# Altium PCB Function-Generator.PcbDoc (part 1 of 2)
Units mm, origin at the board's own origin, x right, y up, seen from the top; angles counter-clockwise.
Board outline 70 x 70 mm, 2 copper layers (Top Layer, Bottom Layer), stack 1.569 mm thick; 87 components, 40 nets, 246 pads, 57 vias.
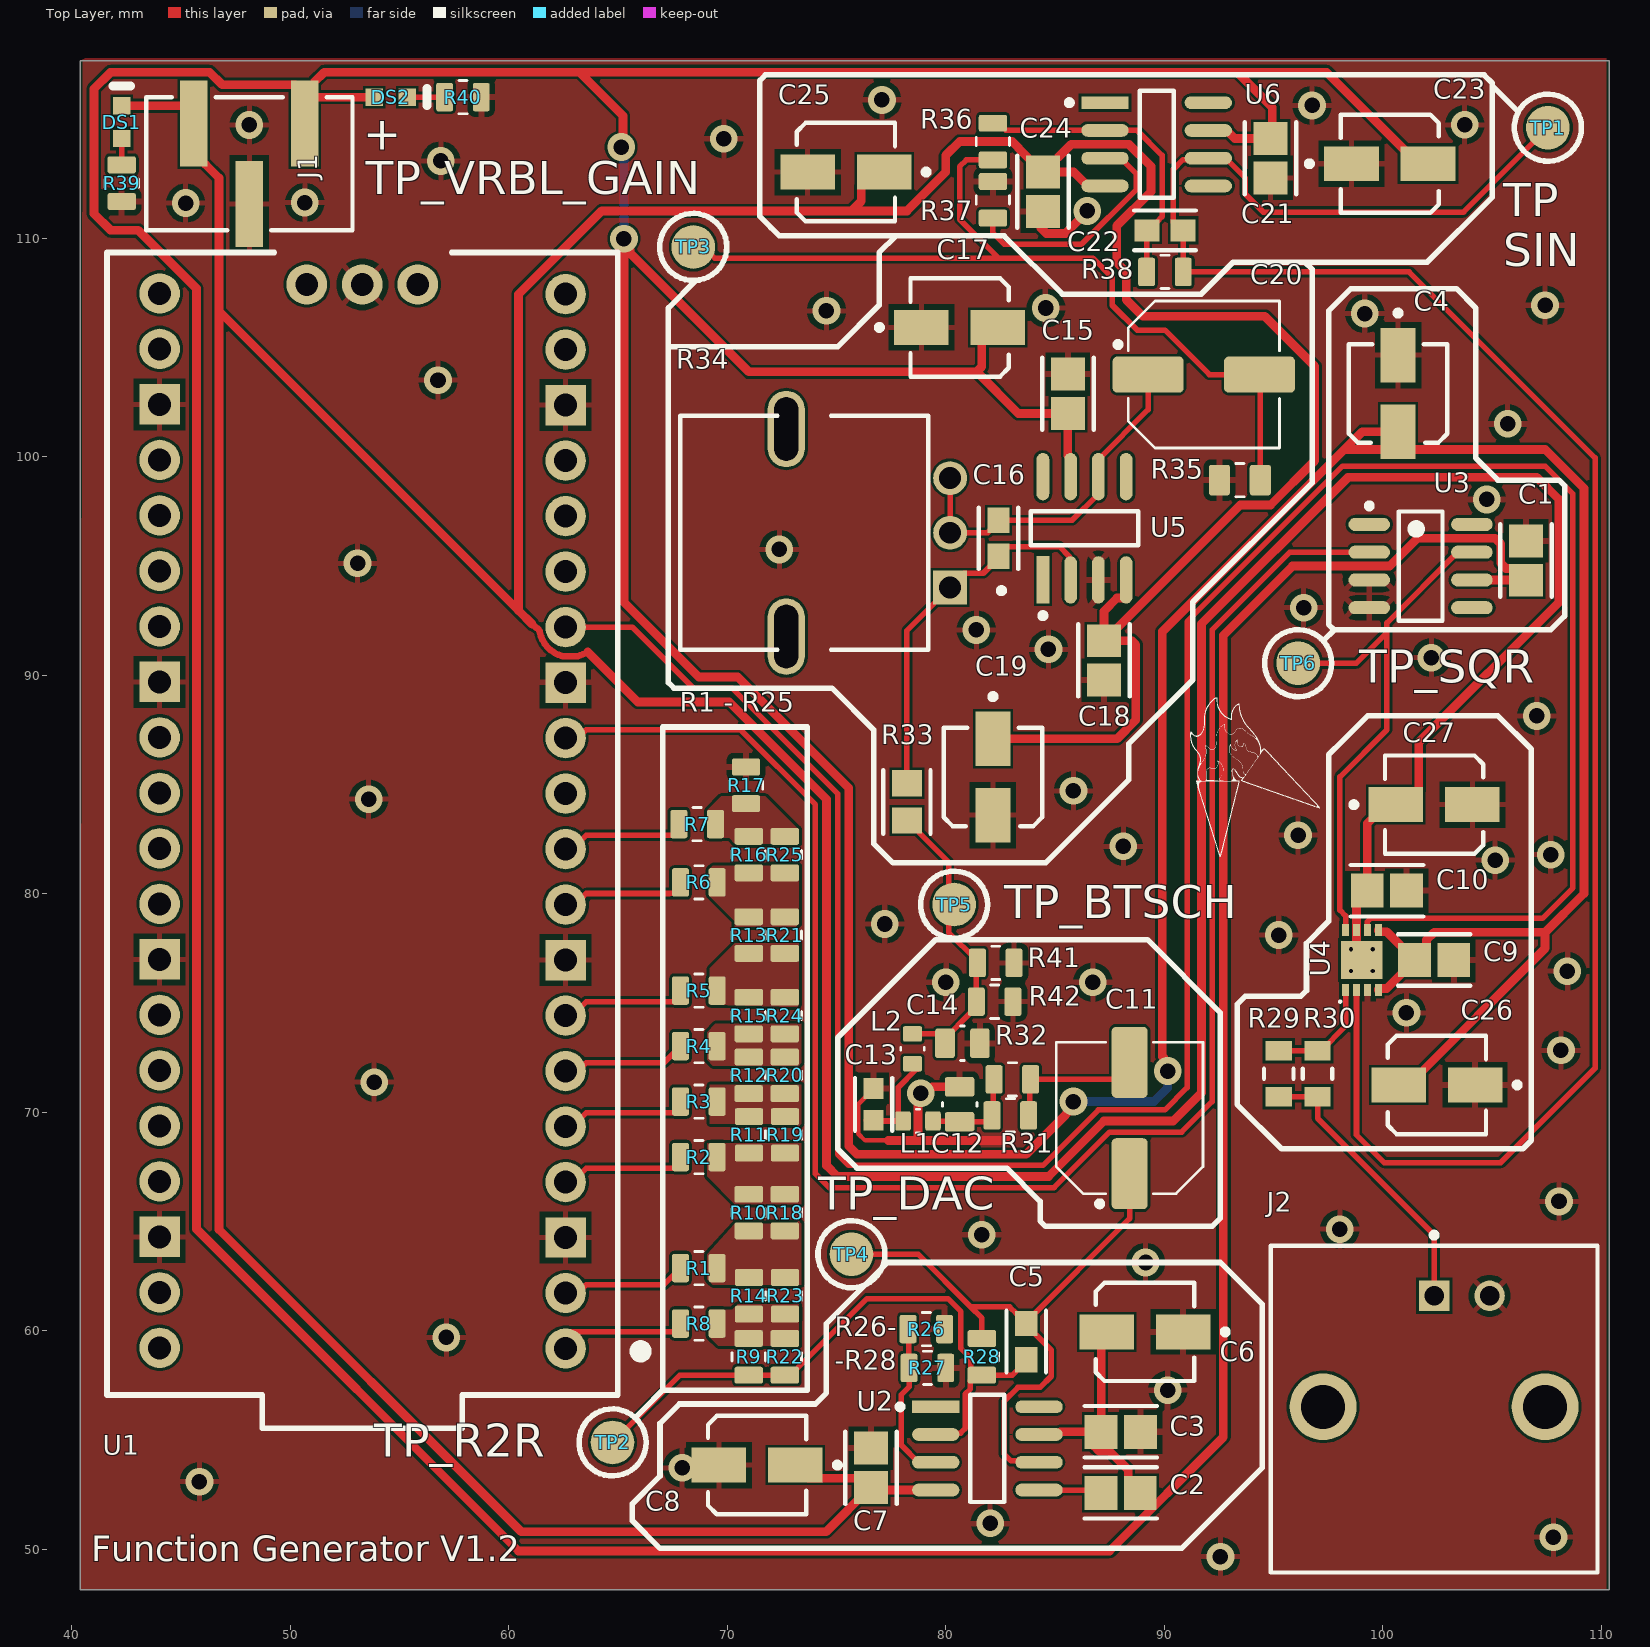
[diagram p0: Top Layer view]
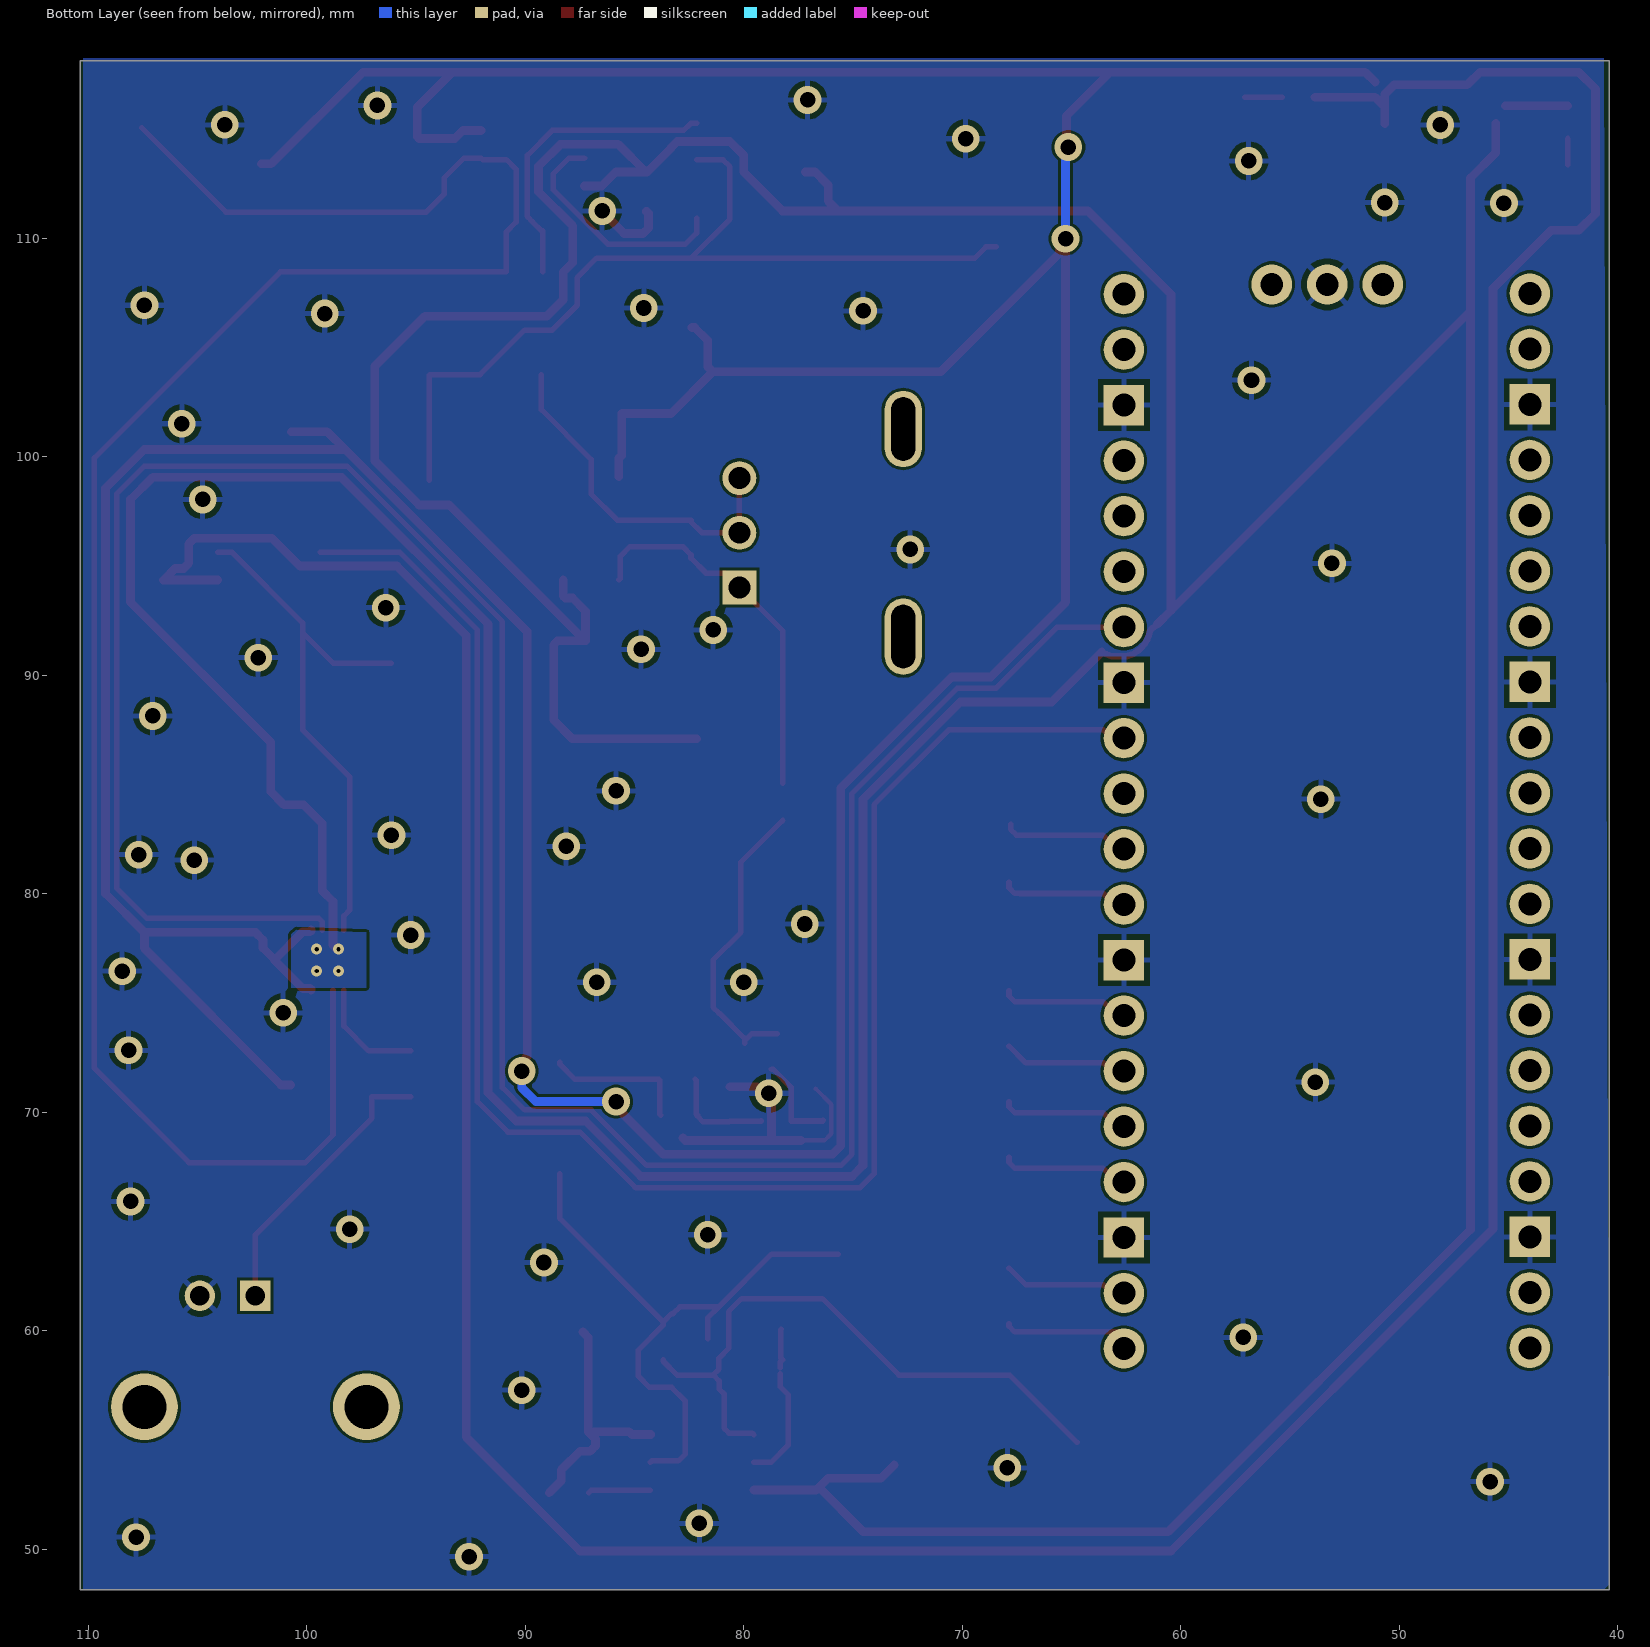
[diagram p1: Bottom Layer view, seen from below]

## Layer stack, top to bottom
Top Solder: solder mask 0.0254, SM-001, Dk 4
Top Layer: signal copper 0.035
Dielectric 1: core 1.4986, Core-043, Dk 4.3
Bottom Layer: signal copper 0.035
Bottom Solder: solder mask 0.0254, SM-001, Dk 4

## Board outline
40.386,48.133 40.386,118.133 110.386,118.133 110.386,48.133

## Design rules (kind name [scope] priority, off if disabled: settings)
Clearance [All] p1: gap=0.127 ignorepadtopadclearanceinfootprint=FALSE except(0.254: THPad-Via Via-Via)
HoleSize [All] p1: absolutevalues=TRUE maxlimit=6 minlimit=0.3 maxpercent=80.000 minpercent=20.000
MinimumSolderMaskSliver [All] p1: minsoldermaskwidth=0.11
PolygonConnect PolygonConnect_36 [All vs InNet('GND')] p1: thpad.connectstyle=Relief thpad.reliefconductorwidth=0.254 thpad.reliefentries=4 thpad.polygonreliefangle="90 Angle" thpad.airgapwidth=0.254 thpad.conductorbypadedge=TRUE thpad.mindistance=0.381 thpad.enablemindistance=FALSE smdpad.connectstyle=Relief smdpad.reliefconductorwidth=0.254 smdpad.reliefentries=4 smdpad.polygonreliefangle="90 Angle" smdpad.airgapwidth=0.254 smdpad.conductorbypadedge=TRUE smdpad.mindistance=0.381 smdpad.enablemindistance=FALSE via.connectstyle=Relief via.reliefconductorwidth=0.254 via.reliefentries=4 via.polygonreliefangle="90 Angle" via.airgapwidth=0.254
PolygonConnect PolygonConnect_35 [All vs IsNamedPolygon('NONET_L-01_P-001')] p2: connectstyle=Direct reliefconductorwidth=0.254 reliefentries=4 polygonreliefangle="90 Angle" airgapwidth=0.254
PolygonConnect PolygonConnect_34 [All vs IsNamedPolygon('NONET_L-01_P-001')] p3: connectstyle=Direct reliefconductorwidth=0.254 reliefentries=4 polygonreliefangle="90 Angle" airgapwidth=0.254
PolygonConnect PolygonConnect_33 [All vs IsNamedPolygon('NONET_L-01_P-001')] p4: thpad.connectstyle=Relief thpad.reliefconductorwidth=0.254 thpad.reliefentries=4 thpad.polygonreliefangle="90 Angle" thpad.airgapwidth=0.254 thpad.conductorbypadedge=TRUE thpad.mindistance=0.381 thpad.enablemindistance=FALSE smdpad.connectstyle=Relief smdpad.reliefconductorwidth=0.254 smdpad.reliefentries=4 smdpad.polygonreliefangle="90 Angle" smdpad.airgapwidth=0.254 smdpad.conductorbypadedge=TRUE smdpad.mindistance=0.381 smdpad.enablemindistance=FALSE via.connectstyle=Relief via.reliefconductorwidth=0.254 via.reliefentries=4 via.polygonreliefangle="90 Angle" via.airgapwidth=0.254
PolygonConnect PolygonConnect_32 [All vs IsNamedPolygon('NONET_L-01_P-001')] p5: thpad.connectstyle=Direct thpad.reliefconductorwidth=0.254 thpad.reliefentries=4 thpad.polygonreliefangle="90 Angle" thpad.airgapwidth=0.254 smdpad.connectstyle=Direct smdpad.reliefconductorwidth=0.254 smdpad.reliefentries=4 smdpad.polygonreliefangle="90 Angle" smdpad.airgapwidth=0.254 via.connectstyle=Relief via.reliefconductorwidth=0.254 via.reliefentries=4 via.polygonreliefangle="90 Angle" via.airgapwidth=0.254
PolygonConnect PolygonConnect_31 [All vs IsNamedPolygon('NONET_L-01_P-001')] p6: thpad.connectstyle=Direct thpad.reliefconductorwidth=0.254 thpad.reliefentries=4 thpad.polygonreliefangle="90 Angle" thpad.airgapwidth=0.254 smdpad.connectstyle=Direct smdpad.reliefconductorwidth=0.254 smdpad.reliefentries=4 smdpad.polygonreliefangle="90 Angle" smdpad.airgapwidth=0.254 via.connectstyle=Relief via.reliefconductorwidth=0.254 via.reliefentries=4 via.polygonreliefangle="90 Angle" via.airgapwidth=0.254
PolygonConnect PolygonConnect_30 [All vs IsNamedPolygon('NONET_L-01_P-001')] p7: thpad.connectstyle=Direct thpad.reliefconductorwidth=0.254 thpad.reliefentries=4 thpad.polygonreliefangle="90 Angle" thpad.airgapwidth=0.254 smdpad.connectstyle=Direct smdpad.reliefconductorwidth=0.254 smdpad.reliefentries=4 smdpad.polygonreliefangle="90 Angle" smdpad.airgapwidth=0.254 via.connectstyle=Relief via.reliefconductorwidth=0.254 via.reliefentries=4 via.polygonreliefangle="90 Angle" via.airgapwidth=0.254
PolygonConnect PolygonConnect_29 [All vs IsNamedPolygon('NONET_L-01_P-001')] p8: thpad.connectstyle=Direct thpad.reliefconductorwidth=0.254 thpad.reliefentries=4 thpad.polygonreliefangle="90 Angle" thpad.airgapwidth=0.254 smdpad.connectstyle=Direct smdpad.reliefconductorwidth=0.254 smdpad.reliefentries=4 smdpad.polygonreliefangle="90 Angle" smdpad.airgapwidth=0.254 via.connectstyle=Relief via.reliefconductorwidth=0.254 via.reliefentries=4 via.polygonreliefangle="90 Angle" via.airgapwidth=0.254
PolygonConnect PolygonConnect_28 [All vs IsNamedPolygon('NONET_L-01_P-001')] p9: thpad.connectstyle=Direct thpad.reliefconductorwidth=0.254 thpad.reliefentries=4 thpad.polygonreliefangle="90 Angle" thpad.airgapwidth=0.254 smdpad.connectstyle=Direct smdpad.reliefconductorwidth=0.254 smdpad.reliefentries=4 smdpad.polygonreliefangle="90 Angle" smdpad.airgapwidth=0.254 via.connectstyle=Relief via.reliefconductorwidth=0.254 via.reliefentries=4 via.polygonreliefangle="90 Angle" via.airgapwidth=0.254
PolygonConnect PolygonConnect_27 [All vs IsNamedPolygon('NONET_L-01_P-001')] p10: thpad.connectstyle=Direct thpad.reliefconductorwidth=0.254 thpad.reliefentries=4 thpad.polygonreliefangle="90 Angle" thpad.airgapwidth=0.254 smdpad.connectstyle=Direct smdpad.reliefconductorwidth=0.254 smdpad.reliefentries=4 smdpad.polygonreliefangle="90 Angle" smdpad.airgapwidth=0.254 via.connectstyle=Relief via.reliefconductorwidth=0.254 via.reliefentries=4 via.polygonreliefangle="90 Angle" via.airgapwidth=0.254
PolygonConnect PolygonConnect_26 [All vs IsNamedPolygon('NONET_L-01_P-001')] p11: thpad.connectstyle=Direct thpad.reliefconductorwidth=0.254 thpad.reliefentries=4 thpad.polygonreliefangle="90 Angle" thpad.airgapwidth=0.254 smdpad.connectstyle=Direct smdpad.reliefconductorwidth=0.254 smdpad.reliefentries=4 smdpad.polygonreliefangle="90 Angle" smdpad.airgapwidth=0.254 via.connectstyle=Relief via.reliefconductorwidth=0.254 via.reliefentries=4 via.polygonreliefangle="90 Angle" via.airgapwidth=0.254
PolygonConnect PolygonConnect_25 [All vs IsNamedPolygon('NONET_L-01_P-001')] p12: thpad.connectstyle=Direct thpad.reliefconductorwidth=0.254 thpad.reliefentries=4 thpad.polygonreliefangle="90 Angle" thpad.airgapwidth=0.254 smdpad.connectstyle=Direct smdpad.reliefconductorwidth=0.254 smdpad.reliefentries=4 smdpad.polygonreliefangle="90 Angle" smdpad.airgapwidth=0.254 via.connectstyle=Relief via.reliefconductorwidth=0.254 via.reliefentries=4 via.polygonreliefangle="90 Angle" via.airgapwidth=0.254
PolygonConnect PolygonConnect_24 [All vs IsNamedPolygon('NONET_L-01_P-001')] p13: connectstyle=Direct reliefconductorwidth=0.254 reliefentries=4 polygonreliefangle="90 Angle" airgapwidth=0.254
PolygonConnect PolygonConnect_23 [All vs IsNamedPolygon('NONET_L-01_P-001')] p14: thpad.connectstyle=Relief thpad.reliefconductorwidth=0.254 thpad.reliefentries=4 thpad.polygonreliefangle="90 Angle" thpad.airgapwidth=0.254 thpad.conductorbypadedge=TRUE thpad.mindistance=0.381 thpad.enablemindistance=FALSE smdpad.connectstyle=Relief smdpad.reliefconductorwidth=0.254 smdpad.reliefentries=4 smdpad.polygonreliefangle="90 Angle" smdpad.airgapwidth=0.254 smdpad.conductorbypadedge=TRUE smdpad.mindistance=0.381 smdpad.enablemindistance=FALSE via.connectstyle=Relief via.reliefconductorwidth=0.254 via.reliefentries=4 via.polygonreliefangle="90 Angle" via.airgapwidth=0.254
PolygonConnect PolygonConnect_22 [All vs IsNamedPolygon('NONET_L-01_P-001')] p15: thpad.connectstyle=Relief thpad.reliefconductorwidth=0.254 thpad.reliefentries=4 thpad.polygonreliefangle="90 Angle" thpad.airgapwidth=0.254 thpad.conductorbypadedge=TRUE thpad.mindistance=0.381 thpad.enablemindistance=FALSE smdpad.connectstyle=Relief smdpad.reliefconductorwidth=0.254 smdpad.reliefentries=4 smdpad.polygonreliefangle="90 Angle" smdpad.airgapwidth=0.254 smdpad.conductorbypadedge=TRUE smdpad.mindistance=0.381 smdpad.enablemindistance=FALSE via.connectstyle=Relief via.reliefconductorwidth=0.254 via.reliefentries=4 via.polygonreliefangle="90 Angle" via.airgapwidth=0.254
PolygonConnect PolygonConnect_21 [All vs IsNamedPolygon('NONET_L-01_P-001')] p16: thpad.connectstyle=Direct thpad.reliefconductorwidth=0.254 thpad.reliefentries=4 thpad.polygonreliefangle="90 Angle" thpad.airgapwidth=0.254 smdpad.connectstyle=Direct smdpad.reliefconductorwidth=0.254 smdpad.reliefentries=4 smdpad.polygonreliefangle="90 Angle" smdpad.airgapwidth=0.254 via.connectstyle=Relief via.reliefconductorwidth=0.254 via.reliefentries=4 via.polygonreliefangle="90 Angle" via.airgapwidth=0.254
PolygonConnect PolygonConnect_20 [All vs IsNamedPolygon('NONET_L-01_P-001')] p17: connectstyle=Direct reliefconductorwidth=0.254 reliefentries=4 polygonreliefangle="90 Angle" airgapwidth=0.254
PolygonConnect PolygonConnect_19 [All vs IsNamedPolygon('NETR8_2_L01_P006')] p18: connectstyle=Direct reliefconductorwidth=0.254 reliefentries=4 polygonreliefangle="90 Angle" airgapwidth=0.254
PolygonConnect PolygonConnect_18 [All vs IsNamedPolygon('NETR7_2_L01_P005')] p19: connectstyle=Direct reliefconductorwidth=0.254 reliefentries=4 polygonreliefangle="90 Angle" airgapwidth=0.254
PolygonConnect PolygonConnect_17 [All vs IsNamedPolygon('NONET_L01_P004')] p20: connectstyle=Direct reliefconductorwidth=0.254 reliefentries=4 polygonreliefangle="90 Angle" airgapwidth=0.254
PolygonConnect PolygonConnect_16 [All vs IsNamedPolygon('NETR5_2_L01_P003')] p21: connectstyle=Direct reliefconductorwidth=0.254 reliefentries=4 polygonreliefangle="90 Angle" airgapwidth=0.254
PolygonConnect PolygonConnect_15 [All vs IsNamedPolygon('NONET_L01_P002')] p22: connectstyle=Direct reliefconductorwidth=0.254 reliefentries=4 polygonreliefangle="90 Angle" airgapwidth=0.254
PolygonConnect PolygonConnect_14 [All vs IsNamedPolygon('NONET_L01_P001')] p23: connectstyle=Direct reliefconductorwidth=0.254 reliefentries=4 polygonreliefangle="90 Angle" airgapwidth=0.254
PolygonConnect PolygonConnect_13 [All vs IsNamedPolygon('NONET_L01_P000')] p24: connectstyle=Direct reliefconductorwidth=0.254 reliefentries=4 polygonreliefangle="90 Angle" airgapwidth=0.254
PolygonConnect PolygonConnect_12 [All vs IsNamedPolygon('NONET_L02_P012')] p25: connectstyle=Direct reliefconductorwidth=0.254 reliefentries=4 polygonreliefangle="90 Angle" airgapwidth=0.254
PolygonConnect PolygonConnect_11 [All vs IsNamedPolygon('VEE_L02_P011')] p26: connectstyle=Direct reliefconductorwidth=0.254 reliefentries=4 polygonreliefangle="90 Angle" airgapwidth=0.254
PolygonConnect PolygonConnect_10 [All vs IsNamedPolygon('NONET_L01_P008')] p27: connectstyle=Relief reliefconductorwidth=0.254 reliefentries=4 polygonreliefangle="90 Angle" airgapwidth=0.254
PolygonConnect PolygonConnect_9 [InNetClass('R-2R')] p28: connectstyle=Direct reliefconductorwidth=0.254 reliefentries=4 polygonreliefangle="90 Angle" airgapwidth=0.254
PolygonConnect PolygonConnect_8 [All vs IsNamedPolygon('NONET_L01_P015')] p29: connectstyle=Direct reliefconductorwidth=0.254 reliefentries=4 polygonreliefangle="90 Angle" airgapwidth=0.254
PolygonConnect PolygonConnect_7 [All vs IsNamedPolygon('NONET_L01_P014')] p30: connectstyle=Direct reliefconductorwidth=0.254 reliefentries=4 polygonreliefangle="90 Angle" airgapwidth=0.254
PolygonConnect PolygonConnect_6 [All vs IsNamedPolygon('NONET_L01_P011')] p31: connectstyle=Direct reliefconductorwidth=0.254 reliefentries=4 polygonreliefangle="90 Angle" airgapwidth=0.254
PolygonConnect PolygonConnect_5 [All vs IsNamedPolygon('NONET_L01_P010')] p32: connectstyle=Direct reliefconductorwidth=0.254 reliefentries=4 polygonreliefangle="90 Angle" airgapwidth=0.254
PolygonConnect PolygonConnect_4 [All vs IsNamedPolygon('NONET_L01_P008')] p33: connectstyle=Direct reliefconductorwidth=0.254 reliefentries=4 polygonreliefangle="90 Angle" airgapwidth=0.254
PolygonConnect PolygonConnect_3 [All vs IsNamedPolygon('NONET_L01_P007')] p34: thpad.connectstyle=Direct thpad.reliefconductorwidth=0.254 thpad.reliefentries=4 thpad.polygonreliefangle="90 Angle" thpad.airgapwidth=0.254 smdpad.connectstyle=Direct smdpad.reliefconductorwidth=0.254 smdpad.reliefentries=4 smdpad.polygonreliefangle="90 Angle" smdpad.airgapwidth=0.254 via.connectstyle=Relief via.reliefconductorwidth=0.254 via.reliefentries=4 via.polygonreliefangle="90 Angle" via.airgapwidth=0.254
PolygonConnect net22 [All vs IsNamedPolygon('NETR8_2_L01_P006')] p35: connectstyle=Direct reliefconductorwidth=0.254 reliefentries=4 polygonreliefangle="90 Angle" airgapwidth=0.254
PolygonConnect PolygonConnect_2 [All vs IsNamedPolygon('NETR8_2_L01_P006')] p36: connectstyle=Direct reliefconductorwidth=0.254 reliefentries=4 polygonreliefangle="90 Angle" airgapwidth=0.254
PolygonConnect PolygonConnect_1 [All vs IsNamedPolygon('NETR8_2_L01_P006')] p37: thpad.connectstyle=Direct thpad.reliefconductorwidth=0.254 thpad.reliefentries=4 thpad.polygonreliefangle="90 Angle" thpad.airgapwidth=0.254 smdpad.connectstyle=Direct smdpad.reliefconductorwidth=0.254 smdpad.reliefentries=4 smdpad.polygonreliefangle="90 Angle" smdpad.airgapwidth=0.254 via.connectstyle=Relief via.reliefconductorwidth=0.254 via.reliefentries=4 via.polygonreliefangle="90 Angle" via.airgapwidth=0.254
PolygonConnect [All] p38: connectstyle=Relief reliefconductorwidth=0.254 reliefentries=4 polygonreliefangle="90 Angle" airgapwidth=0.254
RoutingVias [All] p1: holewidth=0.711 width=1.27 viastyle="Through Hole" minholewidth=0.6 minwidth=1.27 maxholewidth=0.711 maxwidth=1.27
SilkToSilkClearance [All] p1: silktosilkclearance=0.18
SilkToSolderMaskClearance [IsPad] p1: minsilkscreentomaskgap=0.18 clearancetoexposedcopper=TRUE
SolderMaskExpansion [All] p1: expansion=0 istentingtop=FALSE
SupplyNets "Schematic Supply Nets_2" [InNet('GND')] p1: voltage=0.000
SupplyNets "Schematic Supply Nets_1" [InNet('VEE')] p2: voltage=0.000
SupplyNets "Schematic Supply Nets" [InNet('VCC')] p3: voltage=0.000
Width Width_1 [(InNet('GND') OR InNet('VEE') OR InNet('VCC'))] p1: maxlimit=1 minlimit=0.127 preferedwidth=0.4 bottomlayer_minwidth=0.3 minimp=50.000000 maximp=50.000000 favimp=50.000000
Width [All] p2: maxlimit=0.254 minlimit=0.127 preferedwidth=0.254 bottomlayer_minwidth=0.254 minimp=50.000000 maximp=50.000000 favimp=50.000000
26 further rules are at their usual default settings.

## Classes and differential pairs
polygon class PolygonClass_1: NETR4_2_L01_P002

## Components (designator, comment, footprint, x,y, rotation, side; value= is the part's Value field where it differs from the comment)
C1 "CL21B104KCFNNNE" FP-CC0805-0_85-IPC_A 106.569,95.25 r90 top value=100nF
C2 "CL21B104KCFNNNE" FP-CC0805-0_85-IPC_A 88.011,52.578 r0 top value=100nF
C3 "CL21B104KCFNNNE" FP-CC0805-0_85-IPC_A 88.023,55.372 r0 top value=100nF
C4 "EEEFTH100UAR" FP-FTB-MFG 100.711,102.898 r270 top value=10µF
C5 "GCH1885C2A5R0CE01J" FP-GCH188-0_1-e0_2_0_5-IPC_A 83.693,59.501 r90 top value=5pF
C6 "EEEFTH100UAR" FP-FTB-MFG 89.126,59.944 r180 top value=10µF
C7 "CL21B104KCFNNNE" FP-CC0805-0_85-IPC_A 76.581,53.721 r90 top value=100nF
C8 "EEEFTH100UAR" FP-FTB-MFG 71.374,53.848 r180 top value=10µF
C9 "CL21B104KCFNNNE" FP-CC0805-0_85-IPC_A 102.362,76.962 r0 top value=100nF
C10 "CL21B104KCFNNNE" FP-CC0805-0_85-IPC_A 100.203,80.137 r0 top value=100nF
C11 "25SEV100M6.3X8" CAPAE660650X800N 88.426,69.733 r90 top value=100µF
C12 "08055A102FAT2A" Chip2PinSM127P600-8N#1 80.645,70.358 r270 top value=1nF
C13 "GCM1885C1H332FA16D" FP-CL10-IPC_B 76.708,70.358 r90 top value=3.3nF
C14 "08055A102FAT2A" Chip2PinSM127P600-8N#1 80.772,73.152 r180 top value=1nF
C15 "CL21B104KCFNNNE" FP-CC0805-0_85-IPC_A 85.598,102.882 r90 top value=100nF
C16 "GCH1885C2A5R0CE01J" FP-GCH188-0_1-e0_2_0_5-IPC_A 82.423,96.266 r90 top value=5pF
C17 "EEEFTH100UAR" FP-FTB-MFG 80.645,105.918 r0 top value=10µF
C18 "CL21B104KCFNNNE" FP-CC0805-0_85-IPC_A 87.249,90.678 r270 top value=100nF
C19 "EEEFTH100UAR" FP-FTB-MFG 82.169,85.344 r270 top value=10µF
C20 "25SEV100M6.3X8" CAPAE660650X800N 91.821,103.759 r0 top value=100µF
C21 "CL21B104KCFNNNE" FP-CC0805-0_85-IPC_A 94.869,113.665 r270 top value=100nF
C22 "GCH1885C2A5R0CE01J" FP-GCH188-0_1-e0_2_0_5-IPC_A 90.043,110.363 r0 top value=5pF
C23 "EEEFTH100UAR" FP-FTB-MFG 100.33,113.411 r0 top value=10µF
C24 "CL21B104KCFNNNE" FP-CC0805-0_85-IPC_A 84.455,112.129 r270 top value=100nF
C25 "EEEFTH100UAR" FP-FTB-MFG 75.438,113.03 r180 top value=10µF
C26 "EEEFTH100UAR" FP-FTB-MFG 102.489,71.247 r180 top value=10µF
C27 "EEEFTH100UAR" FP-FTB-MFG 102.362,84.074 r0 top value=10µF
DS1 "19-217/BHC-ZL1M2RY/3T" EVRL-0603-2_V 42.291,115.316 r90 top
DS2 "19-217/R6C-AL1M2VY/3T" EVRL-0603-2_V 54.61,116.459 r0 top
J1 "IPL1-103-02-L-S-K" FP-IPL1-103-02-L-S-K-0 48.133,113.411 r90 top
J2 "5227161-6" FP-5227161-6-MFG 102.362,45.715 r180 top
L1 "SDFL1608S100KTF" Chip2PinSM127P600-8N#2 78.74,69.596 r180 top value=10µH
L2 "SDFL1608S100KTF" Chip2PinSM127P600-8N#2 78.486,72.898 r90 top value=10µH
R1 "0805W8F2201T5E" Chip2PinSM127P600-8N#3 68.707,62.865 r0 top
R2 "0805W8F2201T5E" Chip2PinSM127P600-8N#3 68.707,67.945 r0 top
R3 "0805W8F2201T5E" Chip2PinSM127P600-8N#3 68.707,70.485 r0 top
R4 "0805W8F2201T5E" Chip2PinSM127P600-8N#3 68.707,73.025 r0 top
R5 "0805W8F2201T5E" Chip2PinSM127P600-8N#3 68.707,75.565 r0 top
R6 "0805W8F2201T5E" Chip2PinSM127P600-8N#3 68.707,80.518 r0 top
R7 "0805W8F2201T5E" Chip2PinSM127P600-8N#3 68.631,83.185 r0 top
R8 "0805W8F2201T5E" Chip2PinSM127P600-8N#3 68.707,60.325 r0 top
R9 "0805W8F2201T5E" Chip2PinSM127P600-8N#3 70.993,58.801 r90 top
R10 "0805W8F2201T5E" Chip2PinSM127P600-8N#3 70.993,65.405 r90 top
R11 "0805W8F2201T5E" Chip2PinSM127P600-8N#3 71.001,68.961 r90 top
R12 "0805W8F2201T5E" Chip2PinSM127P600-8N#3 70.992,71.687 r90 top
R13 "0805W8F2201T5E" Chip2PinSM127P600-8N#3 70.993,78.105 r90 top
R14 "0805W8F2201T5E" Chip2PinSM127P600-8N#3 71.001,61.595 r90 top
R15 "0805W8F2201T5E" Chip2PinSM127P600-8N#3 70.993,74.422 r90 top
R16 "0805W8F2201T5E" Chip2PinSM127P600-8N#3 70.993,81.788 r90 top
R17 "0805W8F2201T5E" Chip2PinSM127P600-8N#3 70.866,84.963 r90 top
R18 "0805W8F2201T5E" Chip2PinSM127P600-8N#3 72.644,65.405 r90 top
R19 "0805W8F2201T5E" Chip2PinSM127P600-8N#3 72.652,68.961 r90 top
R20 "0805W8F2201T5E" Chip2PinSM127P600-8N#3 72.643,71.687 r90 top
R21 "0805W8F2201T5E" Chip2PinSM127P600-8N#3 72.644,78.105 r90 top
R22 "0805W8F2201T5E" Chip2PinSM127P600-8N#3 72.644,58.801 r90 top
R23 "0805W8F2201T5E" Chip2PinSM127P600-8N#3 72.652,61.595 r90 top
R24 "0805W8F2201T5E" Chip2PinSM127P600-8N#3 72.644,74.422 r90 top
R25 "0805W8F2201T5E" Chip2PinSM127P600-8N#3 72.644,81.788 r90 top
R26 "0805W8F2201T5E" Chip2PinSM127P600-8N#3 79.121,60.071 r0 top
R27 "0805W8F2201T5E" Chip2PinSM127P600-8N#3 79.172,58.293 r0 top
R28 "0805W8F2201T5E" Chip2PinSM127P600-8N#3 81.661,58.801 r90 top
R29 "SR0805FR-07100RL" FP-SR0805-MFG 95.25,71.755 r270 top value=100
R30 "SR0805FR-07100RL" FP-SR0805-MFG 97.028,71.755 r270 top value=100
R31 "0805W8F1200T5E" Chip2PinSM127P600-8N#3 82.965,69.85 r180 top value=120
R32 "0805W8F1200T5E" Chip2PinSM127P600-8N#3 83.058,71.501 r180 top value=120
R33 "ERA6ARB102V" FP-ERA6A-IPC_B 78.232,84.201 r90 top value=1k
R34 "RK09L1140A2U" FP-RK09L1140A2U-MFG 73.533,96.52 r90 top value=10k
R35 "0805W8F1004T5E" Chip2PinSM127P600-8N#4 93.472,98.933 r180 top value=1M
R36 "0805W8F2201T5E" Chip2PinSM127P600-8N#3 82.169,114.427 r90 top
R37 "0805W8F2201T5E" Chip2PinSM127P600-8N#3 82.169,111.76 r270 top
R38 "0805W8F2201T5E" Chip2PinSM127P600-8N#3 90.043,108.458 r0 top
R39 "0805W8F2201T5E" Chip2PinSM127P600-8N#3 42.291,112.522 r90 top
R40 "0805W8F2201T5E" Chip2PinSM127P600-8N#3 57.912,116.459 r180 top
R41 "0805W8F1200T5E" Chip2PinSM127P600-8N#3 82.296,76.835 r0 top value=120
R42 "0805W8F1200T5E" Chip2PinSM127P600-8N#3 82.244,75.057 r0 top value=120
TP1 "Test Point pad" TestPointPad-2mm 107.569,115.062 r180 top
TP2 "Test Point pad" TestPointPad-2mm 64.756,54.883 r0 top
TP3 "Test Point pad" TestPointPad-2mm 68.453,109.601 r180 top
TP4 "Test Point pad" TestPointPad-2mm 75.692,63.5 r0 top
TP5 "Test Point pad" TestPointPad-2mm 80.391,79.502 r0 top
TP6 "Test Point pad" TestPointPad-2mm 96.139,90.551 r0 top
U1 "RPI-PICO-MOD" RPI-PICO-MOD 53.302,83.47 r180 top
U2 "LM318DR" FP-D0008A-IPC_B 81.915,54.61 r0 top
U3 "TC4427COA" SOIC-OA8_L 101.743,94.996 r0 top value=12Ω
U4 "ADG1419BCPZ-REEL7" ADI-CP-8-4_V 99.06,76.962 r90 top value=2.4Ω
U5 "LM318DR" FP-D0008A-IPC_B 86.36,96.725 r90 top
U6 "LM318DR" FP-D0008A-IPC_B 89.662,114.3 r0 top

## Footprints (in the part's own frame and the unit in brackets; to place one, negate y for a bottom-side part, rotate by r counter-clockwise, add the part's x,y. Pads: shape width x height; smd on the part's side, far side on the other; paste and mask are expansions set on the pad)
ADI-CP-8-4_V [mm] "SON, 8-Leads, Body 3x2mm, Pitch 0.5mm, Thermal Pad 1.75x1.9mm"
  rect 0.55x0.32 smd: 1(-1.375,0.75) 2(-1.375,0.25) 3(-1.375,-0.25) 4(-1.375,-0.75) 5(1.375,-0.75) 6(1.375,-0.25) 7(1.375,0.25) 8(1.375,0.75)
  rect 1.75x1.9 smd: 9(0,0)
  silkscreen extent -1.95,0.95 -1.85,1.05, body extent -1.5,-1 1.5,1, height 0.8
CAPAE660650X800N [mm] "Aluminum Electrolytic Capacitor, Body 6.60x6.50x8.00mm, IPC Medium Density"
  rrect25% 3.25x1.65 smd: 1(-2.55,0) 2(2.55,0)
  silkscreen extent -4.05,-3.36 3.46,3.36, body extent -3.3,-3.25 3.3,3.25, height 8
Chip2PinSM127P600-8N#1 [mm]
  rrect25% 0.9x1.35 smd: 1(-0.8,0) 2(0.8,0)
  silkscreen extent -0.09,-0.79 0.09,0.79, body extent -1,-0.63 1,0.63, height 1.45
Chip2PinSM127P600-8N#2 [mm]
  rrect25% 0.71x0.88 smd: 1(-0.685,0) 2(0.685,0)
  silkscreen extent -0.07,-0.54 0.07,0.54, body extent -0.8,-0.4 0.8,0.4, height 0.95
Chip2PinSM127P600-8N#3 [mm]
  rrect25% 0.775x1.3 smd: 1(-0.837,0) 2(0.838,0)
  silkscreen extent -0.19,-0.76 0.19,0.76, body extent -1,-0.64 1,0.64, height 0.65
Chip2PinSM127P600-8N#4 [mm] "1Mohm basic resistor"
  rrect25% 0.975x1.4 smd: 1(-0.937,0) 2(0.938,0)
  silkscreen extent -0.19,-0.76 0.19,0.76, body extent -1,-0.61 1,0.61, height 0.65
EVRL-0603-2_V [mm] "SMD, 2-Leads, Body 1.6x0.8mm"
  rect 0.8x0.8 smd: 1(-0.75,0) 2(0.75,0)
  silkscreen extent 1.65,-0.4 1.65,0.4, body extent -0.8,-0.4 0.8,0.4, height 0.5
FP-5227161-6-MFG [mm]
  rect 1.39x1.39 hole 0.89 paste-2539.97 mask+0: 1(0,-15.88)
  round 1.39 hole 0.89 paste-2539.97 mask+0: 2(-2.54,-15.88)
  round 3.06 hole 2.01 paste-2539.97 mask+0: 3(-5.08,-10.8) 4(5.08,-10.8)
  silkscreen extent -7.48,-18.78 7.48,-3.21, body extent -7.58,-18.28 7.58,18.28, height 0.25
FP-CC0805-0_85-IPC_A [mm]
  rect 1.505x1.556 smd paste+0 mask+0: 1(-0.901,0) 2(0.901,0)
  silkscreen extent -1.65,-1.18 1.65,1.18, body extent -2.15,-1.28 2.15,1.28, height 0.25
FP-CL10-IPC_B [mm]
  rect 0.958x0.912 smd paste+0 mask+0: 1(-0.727,0) 2(0.727,0)
  silkscreen extent -1.21,-0.86 1.21,0.86, body extent -1.46,-0.71 1.46,0.71, height 0.25
FP-D0008A-IPC_B [mm]
  rect 2.169x0.582 smd paste+0 mask+0: 1(-2.364,1.905)
  rrect100% 2.169x0.582 smd paste+0 mask+0: 2(-2.364,0.635) 3(-2.364,-0.635) 4(-2.364,-1.905) 5(2.364,-1.905) 6(2.364,-0.635) 7(2.364,0.635) 8(2.364,1.905)
  silkscreen extent -4.12,-2.45 0.78,2.45, body extent -3.7,-2.7 3.7,2.7, height 0.25
FP-ERA6A-IPC_B [mm]
  rect 1.205x1.362 smd paste+0 mask+0: 1(-0.851,0) 2(0.851,0)
  silkscreen extent -1.45,-1.08 1.45,1.08, body extent -1.7,-0.93 1.7,0.93, height 0.25
FP-FTB-MFG [mm]
  rect 2.5x1.6 smd paste+0 mask+0: 1(-1.75,0) 2(1.75,0)
  silkscreen extent -3.8,-2.25 2.25,2.25, body extent -3.25,-2.5 3.25,2.5, height 0.25
FP-GCH188-0_1-e0_2_0_5-IPC_A [mm]
  rect 1.159x1.012 smd paste+0 mask+0: 1(-0.827,0) 2(0.827,0)
  silkscreen extent -1.41,-0.91 1.41,0.91, body extent -1.91,-1.01 1.91,1.01, height 0.25
FP-IPL1-103-02-L-S-K-0 [mm]
  rect 3.94x1.27 smd paste+0 mask+0: 1(1.84,2.54) 2(-1.84,0) 3(1.84,-2.54)
  silkscreen extent -3.05,-4.72 3.05,4.72, body extent -3.91,-4.82 3.91,4.82, height 0.25
FP-RK09L1140A2U-MFG [mm]
  rect 1.55x1.55 hole 1 paste-2539.97 mask+0: 1(-2.5,-6.675)
  round 1.55 hole 1 paste-2539.97 mask+0: 2(0,-6.675) 3(2.5,-6.675)
  rrect100% 3.5x1.7 hole 1.1 slot 2.9 at 0 deg paste-2539.97 mask+0: 4(-4.75,0.825) 5(4.75,0.825)
  silkscreen extent -5.35,-9.15 5.35,5.68, body extent -6.6,-7.55 6.6,5.77, height 0.25
FP-SR0805-MFG [mm]
  rect 0.9x1.2 smd paste+0 mask+0: 1(-1.05,0) 2(1.05,0)
  silkscreen extent -0.23,-0.67 0.23,0.67, body extent -1.6,-0.77 1.6,0.77, height 0.25
RPI-PICO-MOD [mm] "RASPBERRY PI PICO RP2040 BOARD"
  round 1.85 hole 1.05: 1(-9.309,24.288) 2(-9.309,21.748) 4(-9.309,16.668) 5(-9.309,14.128) 6(-9.309,11.588) 7(-9.309,9.048) 9(-9.309,3.968) 10(-9.309,1.428) 11(-9.309,-1.112) 12(-9.309,-3.652) 14(-9.309,-8.732) 15(-9.309,-11.272) 16(-9.309,-13.812) 17(-9.309,-16.352) 19(-9.309,-21.432) 20(-9.309,-23.972) 21(9.271,-24.003) 22(9.271,-21.463) 24(9.271,-16.383) 25(9.271,-13.843) 26(9.271,-11.303) 27(9.271,-8.763) 29(9.271,-3.683) 30(9.271,-1.143) 31(9.271,1.397) 32(9.271,3.937) 34(9.271,9.017) 35(9.271,11.557) 36(9.271,14.097) 37(9.271,16.637) 39(9.271,21.717) 40(9.271,24.257) 41(-2.54,-24.415) 42(0,-24.415) 43(2.54,-24.415)
  rect 1.85x1.85 hole 1.05: 3(-9.309,19.208) 8(-9.309,6.508) 13(-9.309,-6.192) 18(-9.309,-18.892) 23(9.271,-18.923) 28(9.271,-6.223) 33(9.271,6.477) 38(9.271,19.177)
  silkscreen extent -12.99,-25.88 11.68,27.94, body extent -10.49,-25.21 10.51,27.22, height 3.69
SOIC-OA8_L [mm] "SOIC, 8-Leads, Body 4.9x3.9mm, Pitch 1.27mm, IPC High Density"
  oval 1.9x0.6 smd: 1(-2.35,1.905) 2(-2.35,0.635) 3(-2.35,-0.635) 4(-2.35,-1.905) 5(2.35,-1.905) 6(2.35,-0.635) 7(2.35,0.635) 8(2.35,1.905)
  silkscreen extent -2.47,-2.5 1,2.88, body extent -2,-2.5 2,2.5, height 1.75
TestPointPad-2mm [mm]
  round 2 smd: 1(0,0)
  silkscreen extent -1.53,-1.53 1.53,1.53

## Part data
C1 C2 C3 C7 C9 C10 C15 C18 C21 C24: library part CMP-001-00083-4, "100V 100nF X7R 卤10% 0805 Multilayer Ceramic Capacitors MLCC - SMD/SMT ROHS", Case Code (Imperial)=0805, Case Code (Metric)=2012, Dielectric=X7R, Dielectric Material=Ceramic, JLCPCB part #=C28233, Manufacturer Package Identifier=CC0805-0.85, Max Operating Temperature=125°C, Min Operating Temperature=-55°C, Tolerance=10%, Voltage=25V, Voltage Rating=100V, Case/Package=0805, China RoHS=Compliant, Composition=Ceramic, Country of Origin="Mainland China, Taiwan", Depth=1.25mm, Export Control Classification Number (ECCN) Code=EAR99, Halogen Free="Halogen Free", Harmonized Tariff Schedule (HTS) Code=8532.24.00.20, Height=1.25mm, Introduction Date=2003-01-27, Lead Free="Lead Free", Length=2mm, Lifecycle Status=Production, Material=Ceramic, Mounting Technology="Surface Mount", Number of Terminals=2, Packaging="Tape and Reel", Pins=2, Radiation Hardening=No, REACH SVHC=Yes, RoHS=Compliant, Schedule B="8532240020, 8532240020", Termination=SMD/SMT, Thickness=1.3462mm, Voltage Rating (DC)=100V, Weight=5.499807mg, Width=1.25mm
C4 C6 C8 C17 C19 C23 C25 C26 C27: library part CMP-001-00086-3, "Radial Can - SMD ALUMINUM ELECTROLYTIC CAPACITOR FT 50V 10muF ±20% 0.157Dia 4.00mm", Case/Package=Radial, Dielectric Material=Aluminium, ESR (Equivalent Series Resistance)=2.3Ω, JLCPCB part #=C3343, Leakage Current=5µA, Manufacturer Lifecycle Status=ACTIVE, Max Operating Temperature=105°C, Min Operating Temperature=-55°C, Ratings=AEC-Q200, Ripple Current=85mA, Tolerance=20%, Voltage=50V, Contact Plating=Tin, Country of Origin="Japan, Malaysia", Diameter=4mm, Dissipation Factor=10%, Export Control Classification Number (ECCN) Code=EAR99, Harmonized Tariff Schedule (HTS) Code=8532.22.00.20, Height=5.8mm, Height - Seated (Max)=6.096mm, Introduction Date=2011-10-03, Lead Diameter=650µm, Lead Free="Lead Free", Lead Pitch=1mm, Length=5.8mm, Life (Hours)=2000hours, Lifecycle Status=Production, Mounting Technology="Surface Mount", Number of Terminals=2, Packaging="Cut Tape", Part Series="FT (High temp. reflow)", Pins=2, Radiation Hardening=No, REACH SVHC=Yes, Ripple Current (AC)=85mA, RoHS=Compliant, Schedule B="8532220020, 8532220020", Termination=SMD/SMT, Voltage Rating=50V, Voltage Rating (DC)=50V, Width=4.3mm
C5 C16 C22: library part CMP-001-00085-4, "Ceramic Capacitor, YES, Ceramic, 100V, 5% +Tol, 5% -Tol, C0G, 30ppm/Cel TC, 0.000005uF, Surface Mount, 1608M/0603", Case/Package=0603, Dielectric Material=Ceramic, JLCPCB part #=C1673, Manufacturer Lifecycle Status="IN PRODUCTION", Max Operating Temperature=125°C, Min Operating Temperature=-55°C, Ratings=AEC-Q200, Temperature Coefficient=30ppm/°C, Voltage Rating=100V, Export Control Classification Number (ECCN) Code=EAR99, Harmonized Tariff Schedule (HTS) Code=8532.24.00.20, Height=800µm, Introduction Date=2015-10-06, Length=1.6mm, Lifecycle Status=Production, Material=Ceramic, Mounting Technology="Surface Mount", Number of Terminals=2, REACH SVHC=Yes, RoHS=Compliant, Thickness=800µm, Voltage Rating (DC)=100V, Width=800µm
C11 C20: library part CMP-001-00084-3, "Radial Can - SMD ALUMINUM ELECTROLYTIC CAPACITOR SEV 25V 100muF ±20% 0.248Dia 6.30mm", Case/Package=Radial, JLCPCB part #=C3338, Leakage Current=25µA, Max Operating Temperature=85°C, Min Operating Temperature=-40°C, Ratings=AEC-Q200, Ripple Current=145mA, Tolerance=20%, Voltage Rating=25V, Diameter=6.3mm, Height=8mm, Height - Seated (Max)=8.001mm, Lead Free="Lead Free", Length=6.6mm, Life (Hours)=2000hours, Lifecycle Status=Production, Mounting Technology="Surface Mount", Number of Terminals=2, Packaging="Tape & Reel (TR)", Polarity=Polar, Radiation Hardening=No, REACH SVHC=Yes, RoHS=Compliant, Voltage Rating (DC)=25V, Width=6.6mm
C12 C14: library part CMP-001-00088-3, "1nF 50V C0G ±1% 0805 Multilayer Ceramic Capacitors MLCC - SMD/SMT ROHS", Case Code (Imperial)=0805, Case Code (Metric)=2012, Dielectric=CG0, Dielectric Material=Ceramic, JLCPCB part #=C597356, Max Operating Temperature=125°C, Min Operating Temperature=-55°C, Tolerance=10%, Voltage Rating=50V, Case/Package=0805, China RoHS=Compliant, Country of Origin="Mainland China, Philippines, South Korea", Depth=1.25mm, Harmonized Tariff Schedule (HTS) Code=8532.24.00.20, Height=850µm, Introduction Date=2010-07-30, Lead Free="Lead Free", Length=2mm, Lifecycle Status=Production, Material=Ceramic, Mounting Technology="Surface Mount", Number of Terminals=2, Radiation Hardening=No, REACH SVHC=Yes, RoHS=Compliant, Schedule B="8532240020, 8532240020", Thickness=939.8µm, Voltage Rating (DC)=50V, Width=1.25mm
C13: library part CMP-001-00092-3, "50V 3.3nF C0G ±1% 0603 Multilayer Ceramic Capacitors MLCC - SMD/SMT ROHS", Case Code (Imperial)=0603, Case Code (Metric)=1608, Dielectric=X7R, Dielectric Material=Ceramic, JLCPCB part #=C3877267, Manufacturer Lifecycle Status="IN PRODUCTION", Max Operating Temperature=125°C, Min Operating Temperature=-55°C, Ratings=AEC-Q200, Temperature Coefficient=30ppm/°C, Tolerance=1%, Voltage=50V, Case/Package=0603, China RoHS=Compliant, Contact Plating=Tin, Depth=800µm, Export Control Classification Number (ECCN) Code=EAR99, Harmonized Tariff Schedule (HTS) Code=8532.24.00.20, Height=800µm, Introduction Date=2013-11-20, Lead Free="Lead Free", Length=1.6mm, Lifecycle Status=Production, Material=Ceramic, Mounting Technology="Surface Mount", Number of Terminals=2, Radiation Hardening=No, REACH SVHC=Yes, RoHS=Compliant, Schedule B=8532240020, Thickness=800µm, Voltage Rating=50V, Voltage Rating (DC)=50V, Width=800µm
DS1: library part CMP-007-00003-3, "Chip LED, Blue, 5 V, 25 mA, -40 to 85 degC, 2-Pin SMD (0603), RoHS, Tape and Reel", Case/Package=0603, Colour=Blue, Forward Current=25mA, Forward Voltage=3V, JLCPCB part #=C2288, Manufacturer="Everlight Electronics", Max Operating Temperature=85°C, Min Operating Temperature=-40°C, Package Description="2-Pin Surface Mount Device, Body 1.6 x 0.8 mm", Datasheet URL=https://datasheet.ciiva.com/26901/getdatasheetpartid-420616-26901324.pdf, Datasheet Version="Rev. 1.0, 03/2003", Lens Style=Diffused, Luminous Intensity=28.5mcd, Manufacturer URL=http://www.everlight.com/, Mounting Technology=SM, Package Reference=0603, Packaging=TapeandReel, Pins=2, RoHS Compliant=True, Viewing Angle=120degrees
DS2: library part CMP-007-00004-3, "Chip LED, Red, 5 V, 25 mA, -40 to 85 degC, 2-Pin SMD (0603), RoHS, Tape and Reel", Case/Package=0603, Colour=Red, Forward Voltage=2.2V, JLCPCB part #=C2286, Manufacturer="Everlight Electronics", Package Description="2-Pin Surface Mount Device, Body 1.6 x 0.8 mm", Datasheet URL=https://datasheet.ciiva.com/4688/el-19-217-r6c-al1m2vy-3tpdf-187026-4688713.pdf, Datasheet Version="Rev. 1, 01/2005", Lens Style=Clear, Manufacturer URL=http://www.everlight.com/, Mounting Technology=SM, Package Reference=0603, RoHS Compliant=False
J1: library part CMP-002-00080-1, "Samtec 2.54mmpitch3pSingle row pin header, IPL1series, right angle, surface", JLCPCB part #=C3326049, Manufacturer Lifecycle Status=PRODUCTION, Max Current Rating=7.4A, Max Operating Temperature=125°C, Max Voltage Rating (AC)=675V, Min Operating Temperature=-55°C, Contact Material=Bronze, Contact Plating=Gold, Depth=7.04mm, Gender=Male, Housing Material=Polymer, Length=9.14mm, Lifecycle Status=Production, Mounting Technology="Surface Mount", Number of Contacts=3, Number of Ports=1, Number of Rows=1, Number of Terminals=3, Orientation=Straight, Packaging=Bulk, Pitch=2.54mm, Radiation Hardening=No, RoHS=Compliant, Schedule B=8536694040, Termination=Solder
J2: library part CMP-002-00078-1, "RF / Coaxial Connector, BNC Coaxial, Right Angle Jack, Solder, 50 ohm, Phosphor Bronze", Clock Frequency=4GHz, Color=Black, Dielectric Material=Polymethylpentene, Insulation Resistance=5GΩ, JLCPCB part #=C5166169, Manufacturer Lifecycle Status=ACTIVE, Max Operating Temperature=85°C, Min Operating Temperature=-55°C, Operating Force=15.568N, Voltage Rating=500V, Body Material=Zinc, Body Plating=Nickel, China RoHS=Non-Compliant, Connector Type=BNC, Contact Material="Gold, Nickel", Contact Plating=Gold, Contact Style=Coax, Depth=34.93mm, Export Control Classification Number (ECCN) Code=EAR99, Fastening Type=Bayonet, Frequency=4GHz, Gender=Female, Harmonized Tariff Schedule (HTS) Code=8536.69.40.10, Height=16.13mm, Housing Color=Black, Housing Material=Polyester, Impedance=50Ω, Insulation Color=Black, Insulation Material=Polymethylpentene, Introduction Date=2008-07-25, Lead Free="Lead Free", Length=34.93mm, Lifecycle Status=Production, Mounting Technology=Panel, Number of Contacts=1, Number of Ports=1, Number of Positions=1, Orientation="Right Angle", Outside Diameter=14.529mm, Packaging=Bulk, PCB Mounting Orientation="Right Angle", Polarity="Normal, Standard", Radiation Hardening=No, REACH SVHC=No, RoHS=Compliant, Sealable=No, Shell Finish=Nickel, Shielding=Unshielded, Tail Length=4.11mm, Termination=Solder
L1 L2: library part CMP-006-00021-3, "SDFL1608S100KTF, 10uH, 10%, 1 Element, Ferrite-Core, SMD, 0603", Case/Package=0603, DC Resistance (DCR)=1.85Ω, JLCPCB part #=C1035, Max Current Rating=3mA, Max Operating Temperature=85°C, Min Operating Temperature=-40°C, Self Resonant Frequency=17MHz, Test Frequency=2MHz, Tolerance=10%, Core Material=Ferrite, Export Control Classification Number (ECCN) Code=EAR99, Harmonized Tariff Schedule (HTS) Code=8504.50.80.00, Height=800µm, Introduction Date=2012-05-29, Length=1.6mm, Lifecycle Status=Production, Number of Circuits=1, Number of Terminals=2, Q Factor=30, REACH SVHC=Yes, RoHS=Compliant, Shielding=Shielded, Width=800µm
R1 R2 R3 R4 R5 R6 R7 R8 R9 R10 R11 R12 R13 R14 R15 R16 R17 R18 R19 R20 R21 R22 R23 R24 R25 R26 R27 R28 R36 R37 R38 R39 R40: library part CMP-009-00182-3, "chip resistor 2200Ω ±1% 1/8W 0805", Case/Package=0805, JLCPCB part #=C17520, Resistance=2k2
R29 R30: library part CMP-009-00189-3, "125mW Thick Film Resistors 150V ±100ppm/℃ ±1% 100Ω 0805 Chip Resistor - Surface Mount ROHS", Case/Package=0805, JLCPCB part #=C17408, Max Operating Temperature=155°C, Min Operating Temperature=-55°C, Power Rating=125mW, Ratings=AEC-Q200, Temperature Coefficient=100ppm/°C, Tolerance=1%, Voltage Rating=150V, Working Voltage=500V, China RoHS=Non-Compliant, Composition="Thick Film", Height=500µm, Length=2mm, Lifecycle Status=Production, Mounting Technology="Surface Mount", Number of Terminals=2, Packaging="Tape & Reel", REACH SVHC=Yes, RoHS=Compliant, Width=1.25mm
R31 R32 R41 R42: library part CMP-009-00180-3, "Res Thick Film 0805 120 Ohm 1% 0.125W(1/8W) ±100ppm/C Pad SMD T/R", Case/Package=0805, JLCPCB part #=C17437
R33: library part CMP-009-00186-3, "Res Thin Film 0805 1K Ohm 0.1% 0.125W ±10ppm/°C Molded SMD Punched Carrier T/R", Case Code (Imperial)=0805, Case Code (Metric)=2012, JLCPCB part #=C17513, Manufacturer Lifecycle Status=ACTIVE, Max Operating Temperature=155°C, Max Power Dissipation=125mW, Min Operating Temperature=-55°C, Ratings=AEC-Q200, Temperature Coefficient=10ppm/°C, Tolerance=0.1%, Voltage Rating=100V, Voltage Rating (DC)=200V, Case/Package=0805, Composition="Thin Film", Contact Plating=Tin, Country of Origin=Japan, Depth=1.25mm, Export Control Classification Number (ECCN) Code=EAR99, Harmonized Tariff Schedule (HTS) Code=8533.21.00.30, Height=500µm, Introduction Date=2012-05-24, JCLPCB Part #=C17513, Lead Free="Lead Free", Length=2mm, Lifecycle Status=Production, Military Standard=Not, Mounting Technology="Surface Mount", Number of Terminals=2, Number of Terminations=2, Packaging="Cut Tape", Part Series="Thin Film Chip Resistors, High Reliability Type", Pins=2, Power Rating=125mW, Radiation Hardening=No, REACH SVHC=Yes, RoHS=Compliant, Schedule B=8533210045, Termination=SMD/SMT, Width=1.25mm, Working Voltage=100V
R34: library part CMP-009-00188-3, "10k Ohm 1 Gang Linear Through Hole Potentiometer 1.0 Turns 0.05W, 1/20W PC Pins", JLCPCB part #=C470448, Max Operating Temperature=70°C, Min Operating Temperature=-10°C, Power Rating=50mW, Tolerance=20%, Voltage Rating=50V, Working Voltage=10V, Composition=Potentiometer, Depth=7.45mm, Export Control Classification Number (ECCN) Code=EAR99, Height=7.45mm, Hole Diameter=9mm, Introduction Date=2010-01-19, Lead Length=3.5mm, Length=11.35mm, Lifecycle Status=Production, Manufacturer Package Identifier=RK09L1140A2U, Mounting Technology="Brackets, Panel, Through Hole", Number of Terminals=3, Number of Turns=1, Radiation Hardening=No, RoHS=Compliant, Taper=Linear, Termination=Pin, Type=Potentiometer, Width=10.7mm
R35: library part CMP-009-00177-2, "Res Thick Film 0805 1M Ohm 1% 0.125W(1/8W) ±100ppm/C Pad SMD T/R", Case/Package=0805, JLCPCB part #=C17514
TP1 TP2 TP3 TP4 TP5 TP6: library part CMP-002-00079-1
U1: library part CMP-003-000001-2, "RASPBERRY PI PICO RP2040 BOARD", Manufacturer="Raspberry Pi Foundation", Manufacturer Part No=SC0915, Supplier Part No=2648-SC0915CT-ND, Design Item ID=RPI-PICO-MOD, Mounting Technology=SMT, Source=RPi_Pico.SchLib, Supplier Link=https://www.digikey.com/en/products/detail/raspberry-pi/SC0915/13684020
U2 U5 U6: library part CMP-014-00003-3, "Single, 40-V, 15-MHz operational amplifier 8-SOIC 0 to 70", Ambient Temperature Range High=70°C, Case/Package=SOIC, Dual Supply Voltage=9V, Input Bias Current=150nA, Input Offset Voltage (Vos)=4mV, JLCPCB part #=C1347395, Manufacturer Lifecycle Status=ACTIVE, Max Dual Supply Voltage=20V, Max Junction Temperature (Tj)=150°C, Max Supply Voltage=40V, Min Dual Supply Voltage=5V, Min Operating Temperature=0°C, Min Supply Voltage=10V, Nominal Supply Current=5mA, Output Current per Channel=20mA, Voltage Gain=106.02dB, -3db Bandwidth=15MHz, Bandwidth=15MHz, Common Mode Rejection Ratio=70dB, Gain Bandwidth Product=15MHz, Height=1.75mm, JCLPCB Part #=C2871089, Lead Free="Lead Free", Length=4.9mm, Lifecycle Status=Production, Max Operating Temperature=70°C, Mounting Technology="Surface Mount", Number of Channels=1, Number of Circuits=1, Number of Elements=1, Operating Supply Current=5mA, Operating Supply Voltage=20V, Packaging="Cut Tape (CT)", Pins=8, Radiation Hardening=No, RoHS=Compliant, Schedule B="8542330000, 8542330000", Slew Rate=70V/µs, Thickness=1.58mm, Width=3.91mm
U3: library part CMP-014-00004-2, "TC4427COA; Dual MOSFET Power Driver 1.5A; 4.5 to 18V; Non-Inverting; 8-Pin SOIC", Case/Package=SOIC, Input Bias Current=10µA, JLCPCB part #=C636890, Manufacturer Lifecycle Status=REL, Max Operating Temperature=150°C, Max Output current=1.5A, Max Output Voltage=25mV, Max Power Dissipation=470mW, Max Supply Current=4.5mA, Max Supply Voltage=18V, Min Operating Temperature=0°C, Min Supply Voltage=4.5V, Country of Assembly=Thailand, Country of Fabrication="United States of America", Country of Origin=Thailand, Export Control Classification Number (ECCN) Code=EAR99, Fall Time=30ns, Harmonized Tariff Schedule (HTS) Code=8542.39.0060, Height=1.42mm, HS Code=8542.39.0090, Introduction Date=2002-05-16, Lead Free="Lead Free", Length=4.9mm, Lifecycle Status=Production, Mounting Technology="Surface Mount, Through Hole", Nominal Supply Current=4.5mA, Number of Channels=2, Number of Drivers=2, Number of Outputs=2, Output Current=1.5A, Output Voltage=18V, Packaging=Bulk, Pins=8, Power Dissipation=470mW, Projected EOL Date=2034-05-16, Propagation Delay=50ns, Radiation Hardening=No, REACH SVHC=No, Rise Time=30ns, RoHS=Compliant, Schedule B="8542390000, 8542390000", Turn-Off Delay Time=30ns, Turn-On Delay Time=30ns, Width=3.91mm
U4: library part CMP-011-00014-2, "Other Interface ICs; ADG1419BCPZ-REEL7; ANALOG DEVICES; 8; 16.5 V; 5 V; LFCSP EP", Case/Package="LFCSP EP", Drain to Source Resistance=2.4Ω, Dual Supply Voltage=15V, JLCPCB part #=C206632, Manufacturer Lifecycle Status=PRODUCTION, Max Dual Supply Voltage=16.5V, Max Operating Temperature=125°C, Max Power Dissipation=2mW, Max Supply Current=190µA, Min Dual Supply Voltage=4.5V, Min Operating Temperature=-40°C, Min Supply Voltage=5V, Operating Supply Voltage=12V, Test Frequency=1MHz, -3db Bandwidth=135MHz, Bandwidth=135MHz, Contact Plating=Tin, Insertion Loss (dB)=0.16dB, Interface=Parallel, Lead Free="Contains Lead", Lifecycle Status=Production, Max Supply Voltage=16.5V, Number of Channels=1, Number of Circuits=1, Number of Inputs=1, Number of Outputs=2, Packaging="Cut Tape", Pins=8, Polarity=Non-Inverting, Power Dissipation=2mW, Radiation Hardening=No, REACH SVHC=No, RoHS=Compliant, Schedule B="8542390000, 8542390000", Supply Type="Dual, Single", Turn-Off Delay Time=140ns, Turn-On Delay Time=110ns

## Via types
v1: diameter 1.27, hole 0.711, Top Layer to Bottom Layer, 53 vias
v2: diameter 0.5, hole 0.2, Top Layer to Bottom Layer, 4 vias

## Nets (pads, with @x,y where several pads share a name; then routed paths per layer and width w, separated by ;. In a path a pad name is that pad's centre, name@x,y a point inside that pad or via, vN(x,y) a via of type N, cw(c..) or ccw(c..) an arc to the next point about the centre after c; other vN are vias at no path point)
GND: C1.2 C3.2 C4.1 C6.1 C7.2 C8.2 C9.2 C10.2 C12.1 C13.2 C14.1 C15.2 C17.1 C18.2 C19.2 C21.2 C23.1 C24.2 C25.2 C26.1 C27.2 J1.2 J2.2 R17.2 R26.2 R27.2 R35.2 R37.1 R39.1 R40.1 R41.2 R42.2 U1.3 U1.8 U1.13 U1.18 U1.23 U1.28 U1.33 U1.38 U1.42 U3.3 U3.4 U4.3 U5.3 | length 16.9
  Top Layer w0.2: C13.2 76.708,71.062 76.007,70.36 76.007,69.018 76.317,68.707 77.372,68.707 77.382,68.696
  Top Layer w0.4: 77.382,68.696 77.393,68.707 78.74,68.707 ; C12.1 79.394,71.158 79.102,70.866 v1(78.867,70.866) 78.74,70.739 78.74,68.707 ; 82.804,68.834 82.677,68.707 78.74,68.707 ; C24.2 84.372,111.145 84.372,110.456 84.606,110.222 85.487,110.222 86.487,111.222 v1(86.487,111.252)
  other v1: 92.583,49.657 107.823,50.546 82.042,51.181 45.847,53.086 67.945,53.721 90.17,57.277 57.15,59.69 89.154,63.119 81.661,64.389 98.044,64.643 108.077,65.913 53.848,71.374 108.166,72.832 101.092,74.549 80.01,75.946 86.741,75.946 108.458,76.454 95.25,78.105 77.216,78.613 105.156,81.534 107.696,81.788 88.138,82.169 96.136,82.677 53.594,84.328 85.852,84.709 107.061,88.138 102.235,90.805 84.709,91.186 81.407,92.075 96.393,93.091 53.086,95.123 72.39,95.758 104.775,98.044 105.73,101.511 56.769,103.505 99.187,106.553 74.549,106.68 84.582,106.807 107.442,106.934 45.217,111.611 50.673,111.633 56.896,113.538 69.85,114.554 48.133,115.189 103.759,115.192 96.774,116.078 77.089,116.332
GP9: U1.12 U3.2 | length 80.3
  Top Layer w0.254: U1.12@62.446,87.503 62.522,87.427 63.482,87.427 63.558,87.503 70.612,87.503 74.041,84.074 74.041,67.183 74.676,66.548 84.963,66.548 87.503,69.088 90.805,69.088 92.202,70.485 92.202,92.075 95.758,95.631 U3.2
NetC2_1: C2.1 U2.5 | length 2.9
  Top Layer w0.254: U2.5 86.983,52.705 C2.1
NetC5_1: C5.1 R9.1 R22.1 R28.1 TP2.1 U2.2 | length 29.1
  Top Layer w0.254: TP2.1 67.837,57.964 R9.1 R22.1 72.907,57.964 76.411,61.468 80.103,61.468 80.7,60.871 80.7,59.185 81.153,58.732 81.153,58.224 81.413,57.964 R28.1 ; U2.2 79.614,55.308 80.686,55.308 80.899,55.521 80.899,57.09 81.138,57.329 81.138,57.703 81.398,57.964 R28.1 ; C5.1 83.693,58.601 83.056,57.964 R28.1
NetC5_2: C5.2 C11.1 R28.2 TP4.1 U2.6 | length 29.5
  Top Layer w0.254: TP4.1 78.74,63.5 81.153,61.087 ; R28.2 81.661,60.579 81.153,61.087 ; U2.6 84.216,54.038 82.995,54.038 82.677,54.356 82.677,56.769 83.312,57.404 84.328,57.404 84.836,57.912 84.836,59.111 83.693,60.254 C5.2 C5.2@83.693,60.401 ; C11.1 88.426,65.133 C5.2@83.693,60.401 ; 81.153,61.087 82.933,61.087 83.241,60.78 83.314,60.78 C5.2@83.693,60.401
NetC11_2: C11.2 R31.1 R32.1 | length 6.6
  Top Layer w0.254: R31.1 83.849,69.897 83.849,71.454 R32.1 87.734,71.501 88.426,72.193 C11.2
NetC12_2: C12.2 L1.1 R31.2 R32.2 | length 4.8
  Top Layer w0.254: L1.1@79.204,69.596 79.223,69.577 80.659,69.577 80.679,69.558 81.866,69.558 82.127,69.818 R31.2 82.174,69.897 82.174,71.454 R32.2
NetC13_1: C13.1 L1.2 L2.1 | length 4.3
  Top Layer w0.254: C13.1@76.361,69.631 76.396,69.596 77.835,69.596 77.835,71.139 78.655,71.959 L2.1@78.74,71.959
NetC14_2: C14.2 L2.2 R33.1 R41.1 R42.1 TP5.1 | length 13.8
  Top Layer w0.254: R33.1 80.137,81.445 80.137,78.232 81.407,76.962 R42.1 81.407,74.794 81.147,74.534 81.129,74.534 79.972,73.377 C14.2 79.972,73.26 79.649,73.583 L2.2
NetC16_1: C16.1 R33.2 R34.1 U5.2 | length 17.4
  Top Layer w0.254: R33.2 78.232,92.044 R34.1 80.856,94.668 81.725,94.668 82.423,95.366 C16.1 82.423,95.506 82.802,95.885 85.217,95.885 85.662,95.44 85.662,94.424 U5.2
NetC16_2: C16.2 C20.1 R34.2 R34.3 U5.6 | length 16.5
  Top Layer w0.254: R34.3 R34.2 81.924,96.52 82.423,97.019 C16.2 85.793,97.093 86.995,98.295 U5.6 86.995,99.882 89.271,102.158 C20.1
NetC20_2: C20.2 R35.1 R36.1 TP3.1 | length 40.5
  Top Layer w0.254: TP3.1 68.925,109.601 69.433,109.093 82.42,109.093 82.421,109.095 ; R36.1 80.951,113.59 80.645,113.284 80.645,110.871 82.421,109.095 ; R35.1 94.409,103.721 C20.2 92.075,103.759 90.043,105.791 88.773,105.791 87.63,106.934 87.63,108.204 86.739,109.095 82.421,109.095
NetC22_1: C22.1 R36.2 R38.1 U6.2 | length 14
  Top Layer w0.254: R36.2 82.432,115.265 82.761,114.935 U6.2 88.773,114.935 89.916,113.792 89.916,110.996 89.669,110.749 89.669,110.742 89.279,110.352 89.206,110.352 R38.1
NetDS1_1: DS1.1 R39.2 | length 1.2
  Top Layer w0.254: R39.2 DS1.1
NetDS2_2: DS2.2 R40.2 | length 1.7
  Top Layer w0.254: DS2.2 R40.2
NetJ2_1: J2.1 R29.2 R30.2 | length 13.4
  Top Layer w0.254: R29.2 R30.2 97.028,69.723 102.362,64.389 J2.1 J2.1@102.362,61.341
NetR1_1: R1.1 U1.2 | length 5.7
  Top Layer w0.254: U1.2@62.585,62.103 62.661,62.027 63.482,62.027 63.558,62.103 67.108,62.103 R1.1
NetR1_2: R1.2 R10.1 R14.2 R18.1 R23.2
NetR2_1: R2.1 U1.4 | length 6
  Top Layer w0.254: U1.4@62.435,67.437 62.704,67.167 63.288,67.167 63.558,67.437 67.362,67.437 67.364,67.439 67.609,67.439 67.87,67.7 R2.1
NetR2_2: R2.2 R10.2 R11.1 R18.2 R19.1
NetR3_1: R3.1 U1.5 | length 5.9
  Top Layer w0.254: U1.5@62.539,69.977 62.808,69.707 63.288,69.707 63.558,69.977 67.362,69.977 67.364,69.979 67.609,69.979 67.87,70.24 R3.1
NetR3_2: R3.2 R11.2 R12.1 R19.2 R20.1
NetR4_1: R4.1 U1.6 | length 5.8
  Top Layer w0.254: U1.6@62.447,72.263 62.522,72.187 63.482,72.187 63.558,72.263 67.108,72.263 R4.1
NetR4_2: R4.2 R12.2 R15.1 R20.2 R24.1
NetR5_1: R5.1 U1.7 | length 5.9
  Top Layer w0.254: U1.7@62.551,75.057 62.82,74.787 63.288,74.787 63.558,75.057 67.362,75.057 67.364,75.059 67.609,75.059 67.87,75.32 R5.1
NetR5_2: R5.2 R13.1 R15.2 R21.1 R24.2
NetR6_1: R6.1 U1.9 | length 5.8
  Top Layer w0.254: U1.9@62.573,80.01 62.776,79.807 63.348,79.807 63.551,80.01 67.362,80.01 67.364,80.012 67.609,80.012 67.87,80.273 R6.1
NetR6_2: R6.2 R13.2 R16.1 R21.2 R25.1
NetR7_1: R7.1 U1.10 | length 6.1
  Top Layer w0.254: U1.10@62.32,82.677 62.589,82.407 63.288,82.407 63.558,82.677 67.286,82.677 67.288,82.679 67.533,82.679 67.794,82.94 R7.1
NetR7_2: R7.2 R16.2 R17.1 R25.2
NetR8_1: R8.1 U1.1 | length 5.4
  Top Layer w0.254: U1.1@62.653,59.944 67.609,59.944 67.87,60.204 R8.1
NetR8_2: R8.2 R9.2 R14.1 R22.2 R23.1
NetR26_1: R26.1 R27.1 U2.3 | length 7.2
  Top Layer w0.254: R26.1 78.309,60.045 78.309,58.751 78.232,58.674 78.335,58.571 R27.1 ; R27.1@78.328,58.033 78.328,57.424 77.978,57.074 77.978,54.755 78.758,53.975 U2.3
NetR29_1: R29.1 R30.1 U4.1 | length 5.2
  Top Layer w0.254: R29.1 R30.1 97.178,72.805 98.31,73.937 U4.1
NetR37_2: R37.2 U6.3 | length 10.9
  Top Layer w0.254: R37.2 82.169,110.236 82.677,109.728 86.233,109.728 88.731,112.226 88.731,112.945 88.011,113.665 U6.3
NetTP6_1: TP6.1 U3.7 U4.8 | length 24.9
  Top Layer w0.254: TP6.1 98.806,90.551 100.203,91.948 ; U4.8 98.31,78.982 98.044,79.248 98.044,85.344 100.203,87.503 100.203,91.948 ; U3.7 103.443,95.631 100.203,92.391 100.203,91.948
OUT: U1.14 U4.6 | length 120.7
  Top Layer w0.254: U1.14 65.659,92.202 68.453,89.408 70.231,89.408 75.057,84.582 75.057,68.072 75.565,67.564 84.455,67.564 86.995,70.104 90.043,70.104 91.059,71.12 91.059,92.456 98.171,99.568 107.442,99.568 108.712,98.298 108.712,80.264 107.315,78.867 99.459,78.867 99.31,78.718 U4.6
SINE: C22.2 R38.2 TP1.1 U4.2 U6.6 | length 95.5
  Top Layer w0.254: U4.2 98.81,68.957 100.076,67.691 105.41,67.691 109.728,72.009 109.728,99.949 101.219,108.458 R38.2 90.881,110.286 90.424,110.742 90.424,113.157 90.869,113.602 91.963,113.602 U6.6 92.819,113.665 93.726,112.758 93.726,112.014 94.541,111.199 103.706,111.199 TP1.1
VCC: C1.1 C2.2 C3.1 C4.2 C6.2 C9.1 C15.1 C17.2 C21.1 C23.2 C26.2 DS2.1 J1.3 U2.7 U3.6 U4.4 U4.5 U5.7 U6.7 | length 443.7